# Allegro board TERMOSTATONONNA.brd
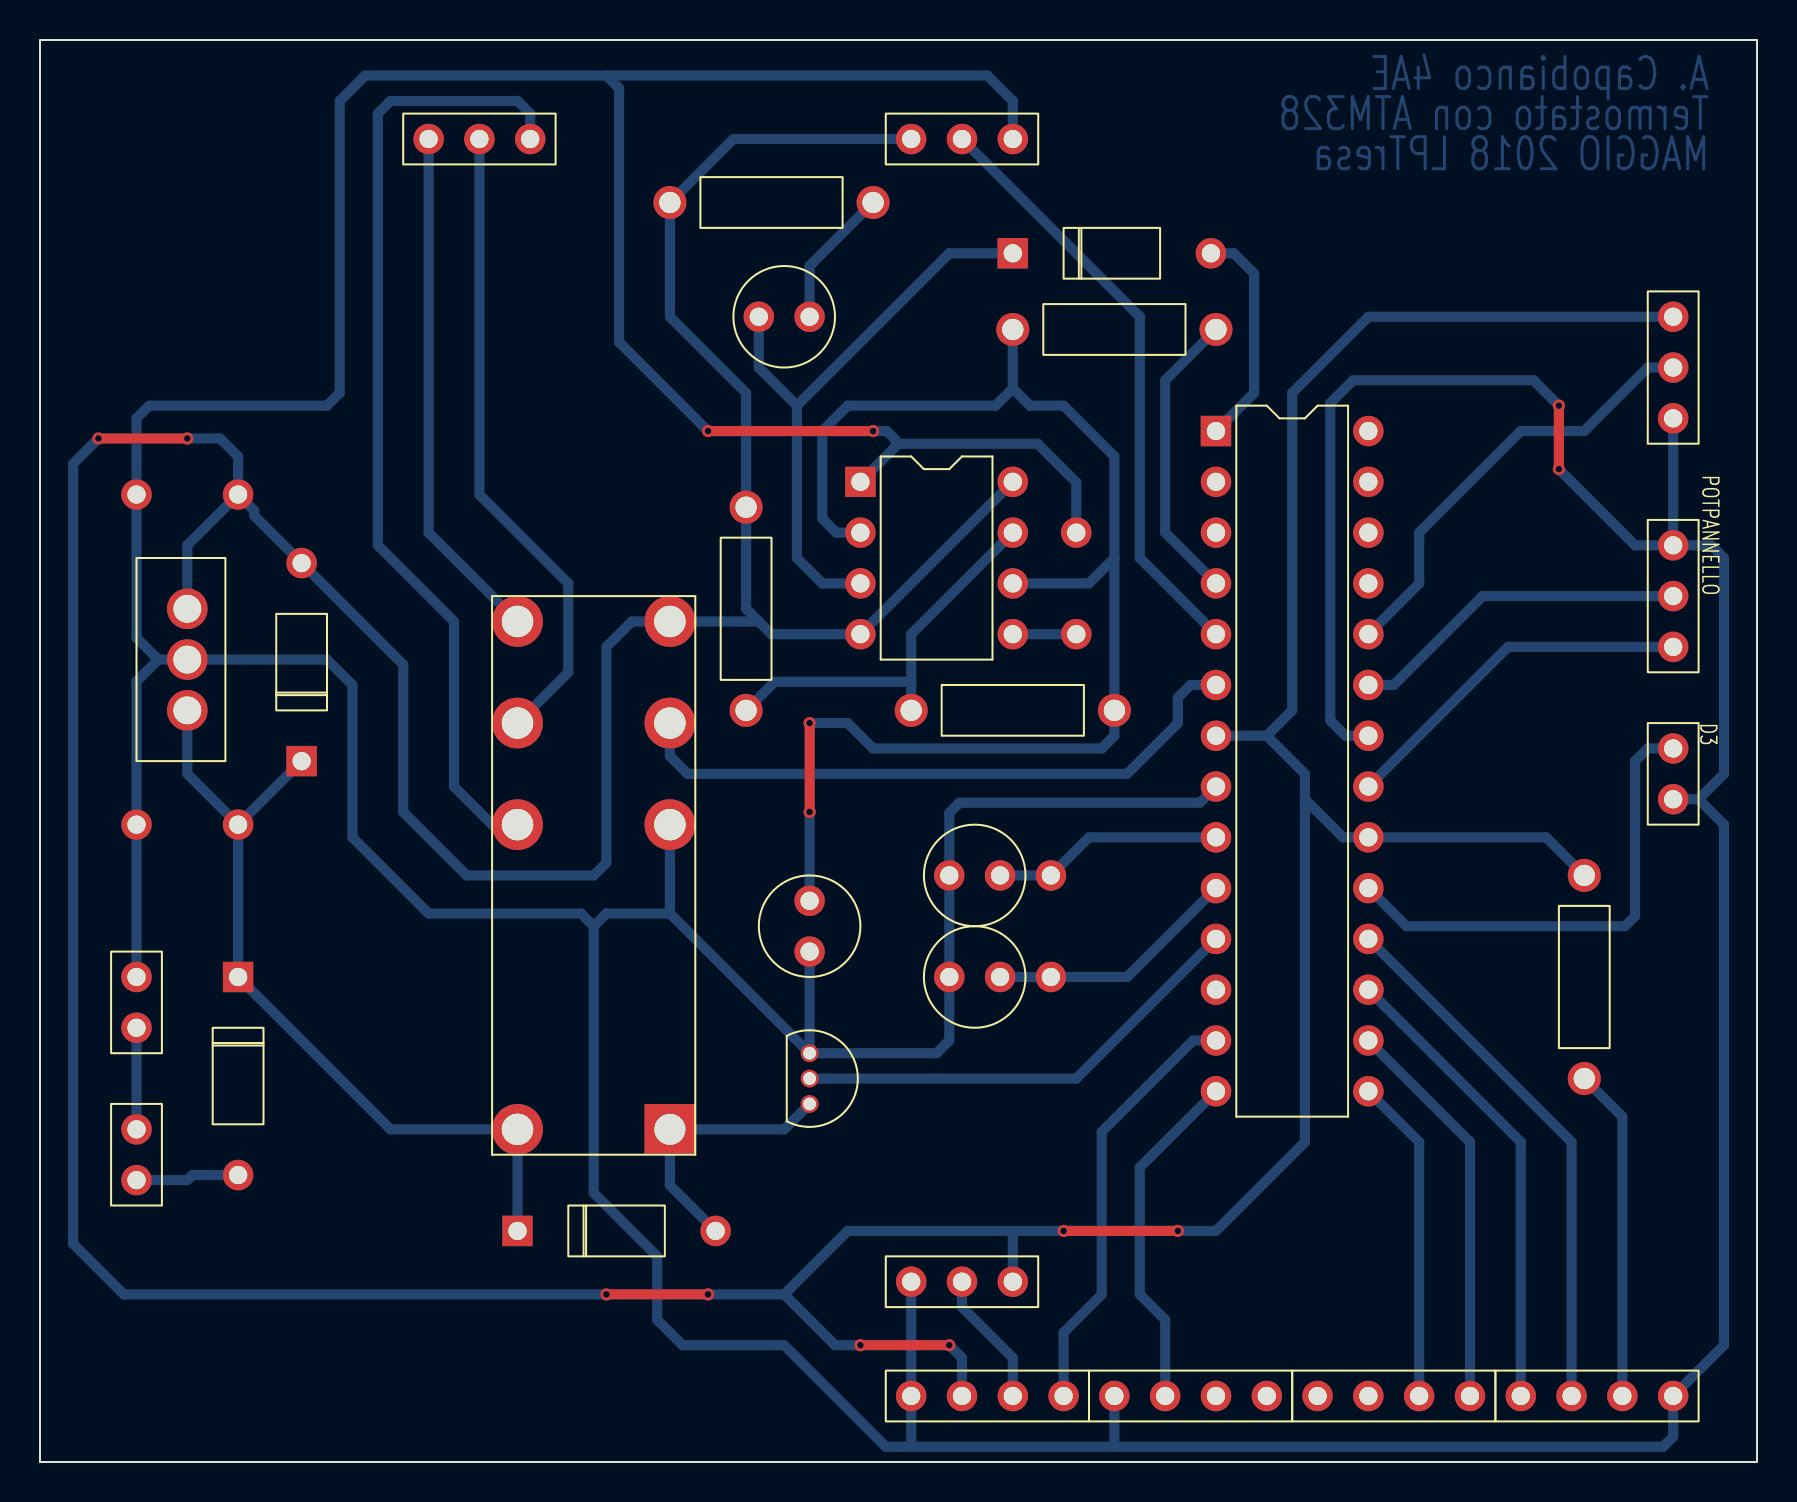
[diagram p0: board, top side]
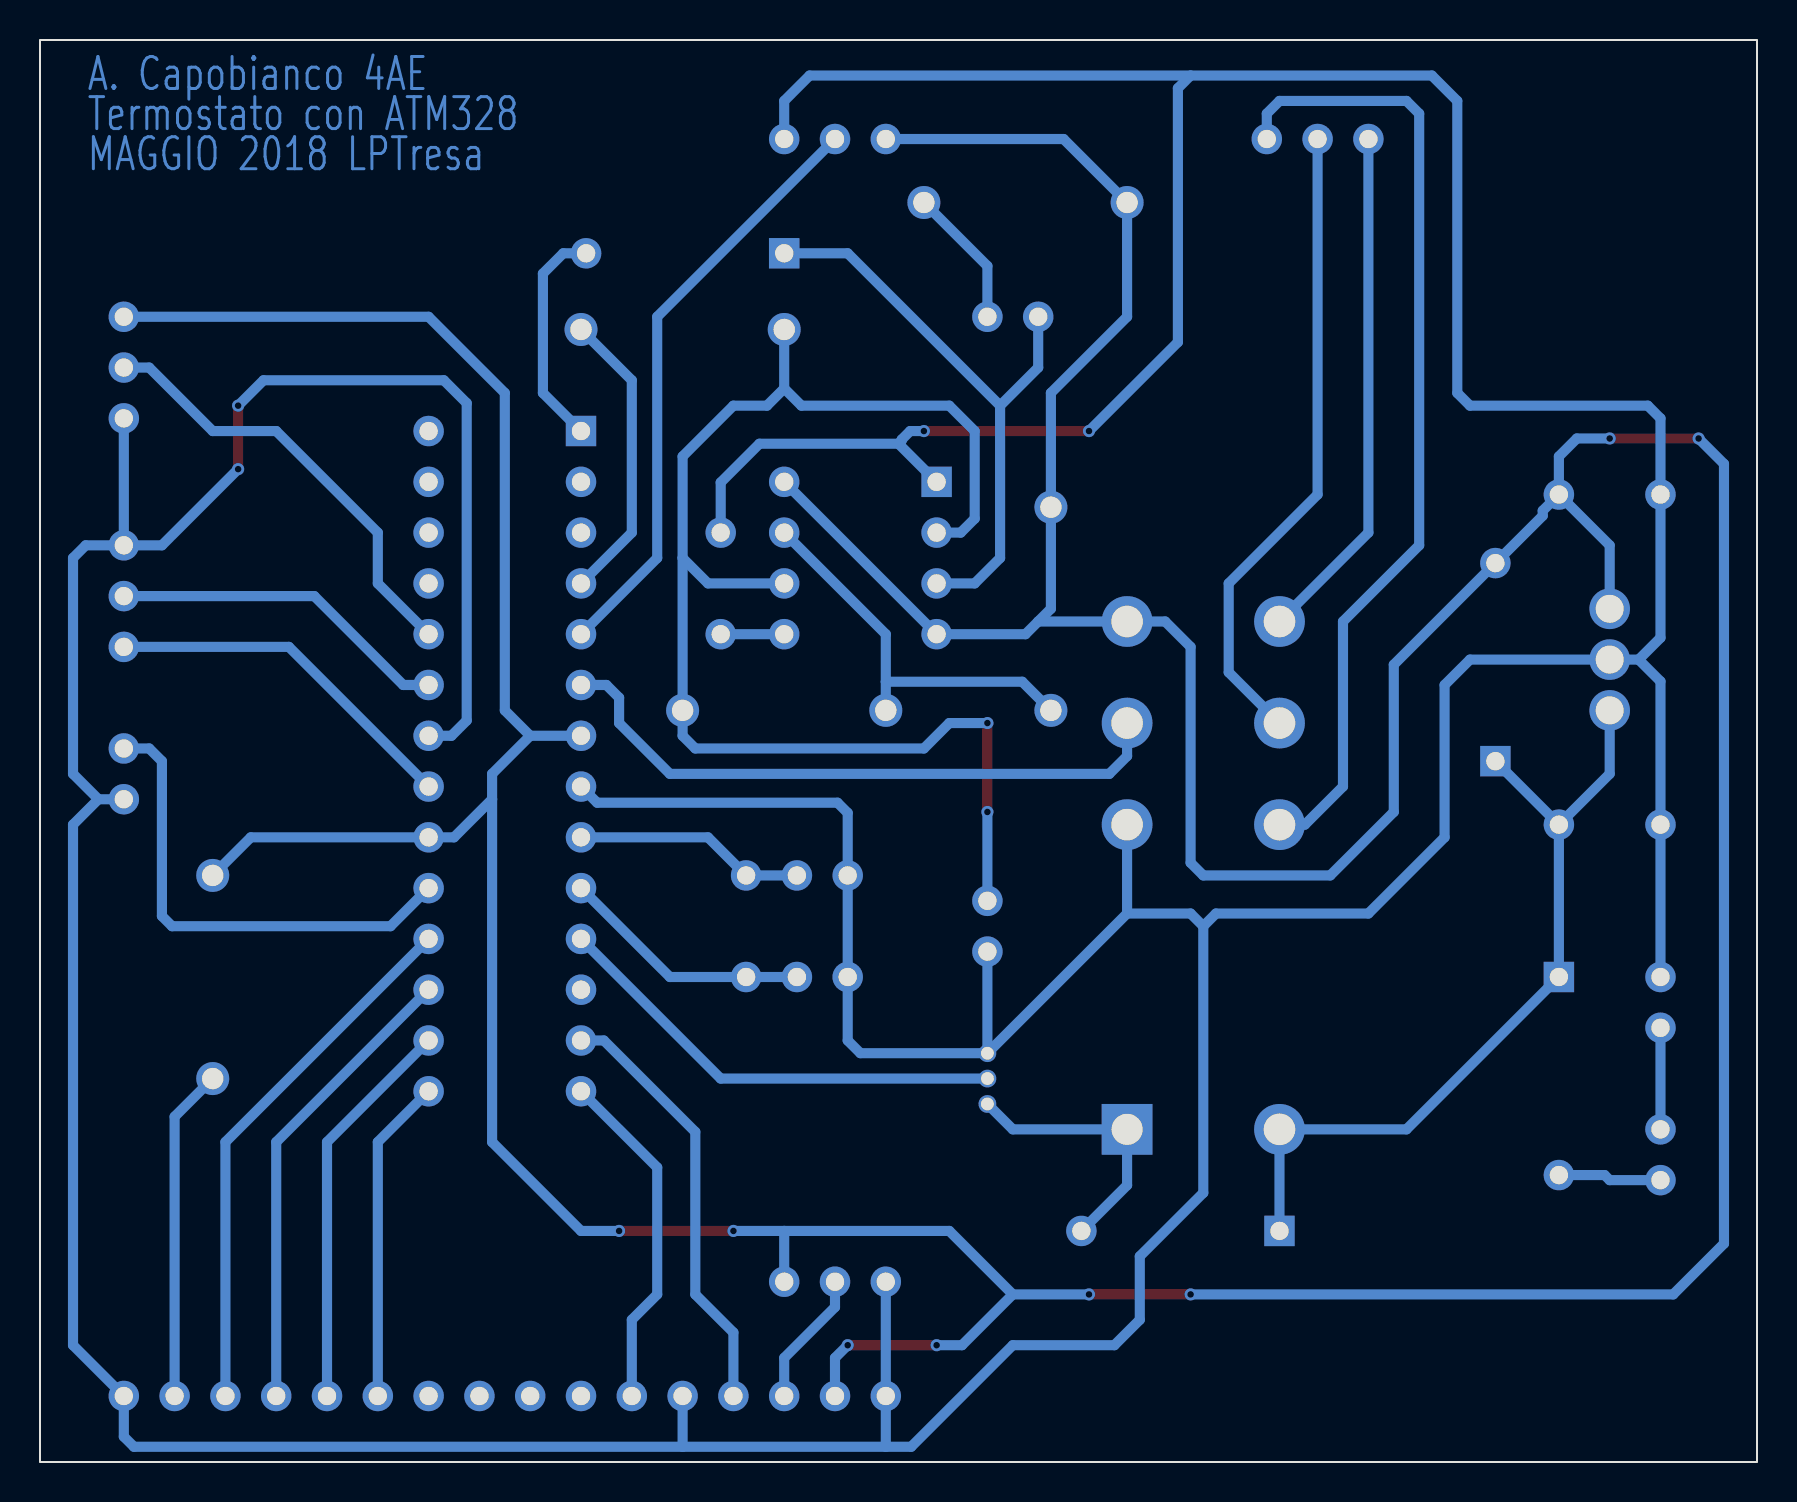
[diagram p1: board, bottom side, seen from below]

Outline 85.85 x 71.12 mm; copper layers: TOP, BOTTOM. Coordinates in mm from the lower left corner of the outline.
Outline path: rectangle 0,0 85.85,71.12

## Design rules (mm)
nets with their own width: min track width 0.508; nets CENTRORELE GND HBEAT N01465 N01985 N02182 N02190 N05199 N05228 N05538 N09482 N09627 N09645 N09720 N10913 N10934 N12659 N14617 N23489 N23493 N25253 N27643 N28065 N30287 N31321 N31329 N31874 N32443 N34175 SICURELE VCC 1.1V VCC 5V VCC 12V

## Placement (name value [footprint] x y rotation side)
C1  22pF  [CAP196]  45.47 29.34 270 top
C2  22pF  [CAP196]  45.47 24.26 270 top
C3  220nF  [CAP200RET]  9.91 31.88 180 top
C4  100nF  [CAP200RET]  9.91 48.39 180 top
C5  100nF  [CAP200RET]  51.82 41.4 90 top
C6  100uF  [CAP196]  38.48 28.07 180 top
D3  SPIA PANNELLO  [JUMPER2]  81.66 35.69 270 top
D4  1N4148  [DO41]  23.88 11.56 270 top
D5  1N4148  [DO41]  9.91 24.26 180 top
D6  1N4148  [DO41]  13.08 35.05 0 top
D7  SPIA WATCHDOG  [CAP196]  38.48 57.28 90 top
D8  1N4148  [DO41]  48.64 60.45 270 top
J1  ALIM 12V  [JUMPER2]  4.83 21.72 90 top
J5  SENSORE  [JUMPER3]  81.66 57.28 270 top
J7  CON4  [JUMPER4]  43.56 3.3 0 top
J8  CON4  [JUMPER4]  53.72 3.3 0 top
J9  CON4  [JUMPER4]  63.88 3.3 0 top
J10  CON4  [JUMPER4]  74.04 3.3 0 top
J11  USC RELE  [JUMPER3]  19.43 66.17 0 top
LS2  RELAY DPDT  [RELAY_DPDT]  31.5 16.64 180 top
POTPANNELLO  10k  [JUMPER3]  81.66 45.85 270 top
Q1  2N2222  [TO92]  38.48 20.45 0 top
R1  220  [RES400]  77.22 29.34 180 top
R2  1M  [RES400]  35.31 47.75 180 top
R3  220  [RES400]  43.56 37.59 270 top
R4  560  [RES400]  58.8 56.64 90 top
R5  220  [RES400]  41.66 62.99 90 top
SW1  INTERRUTTORE  [JUMPER3]  43.56 66.17 0 top
SW2  SW KEY-SPST  [JUMPER2]  4.83 16.64 270 top
TRIMDISP  10k  [JUMPER3]  48.64 9.02 180 top
U1  AtMega328  [DIP28_3]  58.8 51.56 0 top
U2  LM7805  [TO220AB]  7.37 37.59 270 top
U5  NE555  [DIP8_3]  41.02 49.02 0 top
Y1  16MHz  [CAP200RET]  50.55 24.26 90 top

## Library data of the parts
C1-C5 = CAP NP: Tolerance: ***; User Part Number: ***
C6 = CAP POL: Tolerance: ***; User Part Number: ***
D3 = LED: User Part Number: ***
D4-D6 D8 = DIODE
D7 = LED: Tolerance: ***; User Part Number: ***
J1 = CON2: User Part Number: ***
J5 J11 = CON3: User Part Number: ***
J7-J10 = CON4: User Part Number: ***
LS2 = RELAY DPDT_0
POTPANNELLO TRIMDISP = POT: User Part Number: ***
Q1 = 2N2222_0
R1-R5 = RESISTOR: Tolerance: ***; User Part Number: ***
SW1 = SW SPDT: User Part Number: ***
SW2 = SW KEY-SPST: User Part Number: ***
U1 = AtMega328: Tolerance: ***; User Part Number: ***
U2 = LM7805C/TO220_3
U5 = NE555_2: Tolerance: ***; User Part Number: ***
Y1 = CRYSTAL: Tolerance: ***; User Part Number: ***

## Footprints (pads in the part's own frame, mm; a bottom-side part is the same pattern mirrored in y, then rotated)
CAP196
  round 1.524 hole 0.914: 1(0,0) 2(0,2.54)
CAP200RET
  round 1.524 hole 0.914: 1(0,0) 2(5.08,0)
DIP8_3
  rect 1.524x1.524 hole 0.914: 1(0,0)
  round 1.524 hole 0.914: 2(0,-2.54) 3(0,-5.08) 4(0,-7.62) 5(7.62,-7.62) 6(7.62,-5.08) 7(7.62,-2.54) 8(7.62,0)
DIP28_3
  rect 1.524x1.524 hole 0.914: 1(0,0)
  round 1.524 hole 0.914: 2(0,-2.54) 3(0,-5.08) 4(0,-7.62) 5(0,-10.16) 6(0,-12.7) 7(0,-15.24) 8(0,-17.78) 9(0,-20.32) 10(0,-22.86) 11(0,-25.4) 12(0,-27.94) 13(0,-30.48) 14(0,-33.02) 15(7.62,-33.02) 16(7.62,-30.48) 17(7.62,-27.94) 18(7.62,-25.4) 19(7.62,-22.86) 20(7.62,-20.32) 21(7.62,-17.78) 22(7.62,-15.24) 23(7.62,-12.7) 24(7.62,-10.16) 25(7.62,-7.62) 26(7.62,-5.08) 27(7.62,-2.54) 28(7.62,0)
DO41
  rect 1.524x1.524 hole 0.914: 1(0,0)
  round 1.524 hole 0.914: 2(0,9.906)
JUMPER2
  round 1.524 hole 0.914: 1(0,0) 2(2.54,0)
JUMPER3
  round 1.524 hole 0.914: 1(0,0) 2(2.54,0) 3(5.08,0)
JUMPER4
  round 1.524 hole 0.914: 1(0,0) 2(2.54,0) 3(5.08,0) 4(7.62,0)
RELAY_DPDT
  rect 2.54x2.54 hole 1.549: 1(0,0)
  round 2.54 hole 1.575: 2(7.62,0) 3(0,-20.32) 4(0,-15.24) 5(0,-25.4) 6(7.62,-20.32) 7(7.62,-25.4) 8(7.62,-15.24)
RES400
  round 1.651 hole 1.067: 1(0,0) 2(0,10.16)
TO92
  round 0.889 hole 0.635: 1(0,0) 2(0,-1.27) 3(0,-2.54)
TO220AB
  round 2.032 hole 1.397: 1(0,0) 2(-2.54,0) 3(-5.08,0)

## Nets
GND: C1.1 C2.1 C3.2 C4.2 C5.2 C6.2 D3.2(CATHODE) J1.2 J5.3 J7.1 J8.1 J10.4 LS2.4(NC1) POTPANNELLO.1(A) Q1.1(EMITTER) SW1.3(NO) TRIMDISP.3(B) U1.8(GND#8) U1.22(GND#22) U2.2(GND) U5.1(GND)
VCC 1.1V: POTPANNELLO.3(B) U1.21(AREF)
VCC 5V: C4.1 D6.2(A) J5.1 J7.2 LS2.5(NO1) R1.1 R2.1 R5.2 SW1.1(NC) TRIMDISP.1(A) U1.7(VCC#7) U1.20(VCC#20) U2.3(OUT) U5.4(RST) U5.8(VCC)
VCC 12V: C3.1 D4.1(K) D5.1(K) D6.1(K) LS2.2(COIL1) U2.1(IN)
CENTRORELE: J11.2 LS2.6(COMMON2)
HBEAT: R4.1 U1.4(D2)
SICURELE: LS2.3(COMMON1) U1.6(D4)
N01465: J5.2 U1.24(A1)
N01985: POTPANNELLO.2(WIPER) U1.23(A0)
N02182: C1.2 U1.9(XTAL1) Y1.2
N02190: C2.2 U1.10(XTAL2) Y1.1
N05199: J10.2 U1.18(D12)
N05228: J10.1 U1.17(D11~)
N05538: D3.1(ANODE) U1.19(D13)
N09482: J7.3 TRIMDISP.2(WIPER)
N09627: J9.3 U1.15(D9~)
N09645: J9.4 U1.16(D10~)
N09720: J10.3 R1.2
N10913: J7.4 U1.13(D7)
N10934: J8.2 U1.14(D8)
N12659: Q1.2(BASE) U1.11(D5)
N14617: D4.2(A) LS2.1(COIL2) Q1.3(COLLECTOR)
N23489: J11.3 LS2.8(NC2)
N23493: J11.1 LS2.7(NO2)
N25253: J1.1 SW2.1
N27643: D8.2(A) U1.1(RESET)
N28065: C5.1 U5.5(CV)
N30287: D5.2(A) SW2.2
N31321: R2.2 R3.1 U5.7(DSCHG)
N31329: C6.1 R3.2 R4.2 U5.2(TRG) U5.6(THR)
N31874: D7.2(CATHODE) D8.1(K) U5.3(OUT)
N32443: D7.1(ANODE) R5.1
N34175: SW1.2(COMMON) U1.5(D3~)

Pads without a net: J8 3 4; J9 1 2; U1 2 3 12 25 26 27 28

## Via types
v1: diameter 0.61, hole 0.33, TOP to BOTTOM, 14 vias

## Routing (per net, layer and track width the routed paths; a pad name or vN(x,y) marks a point on that pad's centre or on a via; arc(x,y) is an arc through that point)
GND: length 406
  TOP w0.508: v1(75.95,52.83) v1(75.95,49.66) ; v1(41.66,51.56) v1(33.4,51.56)
  BOTTOM w0.508: 43.56,0.76 42.29,0.76 37.21,5.84 32.13,5.84 30.86,7.11 30.86,10.29 27.69,13.46 27.69,26.8 ; 43.56,0.76 J7.1 TRIMDISP.3 ; 43.56,0.76 53.72,0.76 ; 28.32,69.34 47.37,69.34 48.64,68.07 SW1.3 ; 28.32,69.34 28.96,68.71 28.96,56.01 v1(33.4,51.56) ; 28.32,69.34 16.26,69.34 14.99,68.07 14.99,53.47 14.35,52.83 5.46,52.83 4.83,52.2 4.83,41.22 5.92,40.13 ; 27.69,26.8 28.32,27.43 31.5,27.43 ; 27.69,26.8 27.05,27.43 19.43,27.43 15.62,31.24 15.62,38.86 14.35,40.13 U2.2 5.92,40.13 ; 31.5,27.43 LS2.4 ; 31.5,27.43 Q1.1 ; Q1.1 C6.2 ; Q1.1 44.83,20.45 45.47,21.08 C2.1 C1.1 45.47,32.47 45.97,32.97 57.99,32.97 U1.8 ; 82.93,33.15 84.2,34.42 84.2,45.21 83.57,45.85 POTPANNELLO.1 ; 82.93,33.15 84.2,31.88 84.2,5.84 J10.4 81.66,1.27 81.15,0.76 53.72,0.76 ; 82.93,33.15 D3.2 ; 5.92,40.13 4.83,39.04 J1.2 ; POTPANNELLO.1 79.76,45.85 v1(75.95,49.66) ; POTPANNELLO.1 J5.3 ; v1(75.95,52.83) 74.68,54.1 65.66,54.1 64.52,52.96 64.52,37.08 65.28,36.32 U1.22 ; U5.1 42.93,50.93 ; 42.93,50.93 42.77,51.09 42.77,51.14 42.34,51.56 v1(41.66,51.56) ; 42.93,50.93 49.88,50.93 51.82,48.99 C5.2 ; 53.72,0.76 J8.1
VCC 1.1V: length 18.1
  BOTTOM w0.508: POTPANNELLO.3 73.41,40.77 U1.21
VCC 5V: length 317
  TOP w0.508: v1(28.32,8.38) v1(33.4,8.38) ; v1(45.47,5.84) v1(41.02,5.84) ; v1(51.18,11.56) v1(56.9,11.56) ; v1(7.37,51.19) v1(2.92,51.19)
  BOTTOM w0.508: U5.8 U5.4 36.58,41.4 35.94,42.04 ; U2.3 7.37,45.85 C4.1 ; C4.1 9.91,50.29 9.01,51.19 v1(7.37,51.19) ; C4.1 10.71,47.58 10.71,47.32 D6.2 18.16,39.88 18.16,32.51 21.34,29.34 27.69,29.34 28.32,29.97 28.32,40.77 29.59,42.04 LS2.5 35.94,42.04 ; 61.34,36.32 U1.7 ; 61.34,36.32 63.25,34.42 63.25,33.15 ; 61.34,36.32 62.61,37.59 62.61,53.47 66.42,57.28 J5.1 ; 63.25,33.15 63.25,16 58.8,11.56 v1(56.9,11.56) ; 63.25,33.15 65.15,31.24 U1.20 75.31,31.24 R1.1 ; 35.94,42.04 35.31,42.67 R2.1 35.31,53.47 31.5,57.28 R5.2 34.67,66.17 SW1.1 ; J7.2 46.1,5.21 v1(45.47,5.84) ; 37.21,8.38 40.39,11.56 48.64,11.56 ; 37.21,8.38 39.75,5.84 v1(41.02,5.84) ; 37.21,8.38 v1(33.4,8.38) ; v1(2.92,51.19) 1.65,49.92 1.65,10.92 4.19,8.38 v1(28.32,8.38) ; 48.64,11.56 TRIMDISP.1 ; 48.64,11.56 v1(51.18,11.56)
VCC 12V: length 41.1
  BOTTOM w0.508: C3.1 D5.1 17.53,16.64 LS2.2 D4.1 ; C3.1 D6.1 ; C3.1 7.37,34.42 U2.1
CENTRORELE: length 32.1
  BOTTOM w0.508: LS2.6 26.42,39.5 26.42,43.94 21.97,48.39 J11.2
HBEAT: length 14.8
  BOTTOM w0.508: R4.1 56.26,54.1 56.26,46.48 U1.4
SICURELE: length 31.9
  BOTTOM w0.508: LS2.3 31.5,35.31 32.38,34.42 54.36,34.42 56.9,36.96 56.9,38.23 57.53,38.86 U1.6
N01465: length 22.3
  BOTTOM w0.508: U1.24 68.96,43.94 68.96,46.48 74.04,51.56 77.22,51.56 80.39,54.74 81.66,54.74
N01985: length 17.1
  BOTTOM w0.508: U1.23 67.69,38.86 72.14,43.31 POTPANNELLO.2
N02182: length 11.6
  BOTTOM w0.508: U1.9 52.45,31.24 Y1.2 C1.2
N02190: length 12.6
  BOTTOM w0.508: U1.10 54.36,24.26 Y1.1 C2.2
N05199: length 27.1
  BOTTOM w0.508: J10.2 76.58,16 U1.18
N05228: length 23.5
  BOTTOM w0.508: U1.17 74.04,16 J10.1
N05538: length 24.2
  BOTTOM w0.508: U1.19 68.33,26.8 79.25,26.8 79.76,27.31 79.76,35.05 80.39,35.69 D3.1
N09482: length 6.8
  BOTTOM w0.508: J7.3 48.64,5.21 46.1,7.75 TRIMDISP.2
N09627: length 16.3
  BOTTOM w0.508: J9.3 68.96,16 U1.15
N09645: length 19.9
  BOTTOM w0.508: J9.4 71.5,16 U1.16
N09720: length 16.7
  BOTTOM w0.508: J10.3 79.12,17.27 77.22,19.18
N10913: length 21.6
  BOTTOM w0.508: U1.13 57.66,21.08 53.09,16.51 53.09,8.38 51.18,6.48 J7.4
N10934: length 17.3
  BOTTOM w0.508: J8.2 56.26,7.11 54.99,8.38 54.99,14.73 U1.14
N12659: length 23.2
  BOTTOM w0.508: U1.11 51.82,19.18 Q1.2
N14617: length 13.5
  BOTTOM w0.508: D4.2 31.5,13.84 LS2.1 37.21,16.64 Q1.3
N23489: length 48.6
  BOTTOM w0.508: J11.3 24.51,67.44 23.88,68.07 17.53,68.07 16.89,67.44 16.89,45.85 20.7,42.04 20.7,33.78 22.61,31.88 LS2.8
N23493: length 26
  BOTTOM w0.508: LS2.7 19.43,46.48 J11.1
N25253: length 5.1
  BOTTOM w0.508: J1.1 SW2.1
N27643: length 11.2
  BOTTOM w0.508: D8.2 59.69,60.45 60.71,59.44 60.71,53.47 U1.1
N28065: length 3.2
  BOTTOM w0.508: U5.5 C5.1
N30287: length 5.2
  BOTTOM w0.508: D5.2 7.62,14.35 7.37,14.1 SW2.2
N31321: length 19.8
  BOTTOM w0.508: 43.56,39.02 36.74,39.02 R2.2 ; 43.56,39.02 R3.1 ; 43.56,39.02 43.56,41.4 U5.7
N31329: length 70.9
  TOP w0.508: v1(38.48,36.96) v1(38.48,32.51)
  BOTTOM w0.508: 53.72,45.21 52.45,43.94 U5.6 ; 53.72,45.21 53.72,50.29 51.18,52.83 49.5,52.83 48.64,53.69 ; 53.72,45.21 R3.2 53.72,36.32 53.09,35.69 41.66,35.69 40.39,36.96 v1(38.48,36.96) ; v1(38.48,32.51) C6.1 ; 48.64,53.69 R4.2 ; 48.64,53.69 47.78,52.83 40.39,52.83 39.12,51.56 39.12,47.18 39.81,46.48 U5.2
N31874: length 30.5
  BOTTOM w0.508: 37.85,52.83 45.47,60.45 D8.1 ; 37.85,52.83 35.94,54.74 D7.2 ; 37.85,52.83 37.85,45.21 39.12,43.94 U5.3
N32443: length 7
  BOTTOM w0.508: R5.1 38.48,59.82 D7.1
N34175: length 30
  BOTTOM w0.508: SW1.2 54.99,57.28 54.99,45.21 U1.5

## Text on the board
BOTTOM: A. Capobianco 4AE | Termostato con ATM328 | MAGGIO 2018 LPTresa
